# Altium PCB Modulator.PcbDoc (part 3 of 3)
Units mm, origin at the board's own origin, x right, y up, seen from the top; angles counter-clockwise.
Board outline 162.1 x 100.1 mm, 4 copper layers (L1, P2, P5, L6), stack 1.501 mm thick; 138 components, 105 nets, 515 pads, 355 vias.
Unrouted connection lines stored in the file: 38.
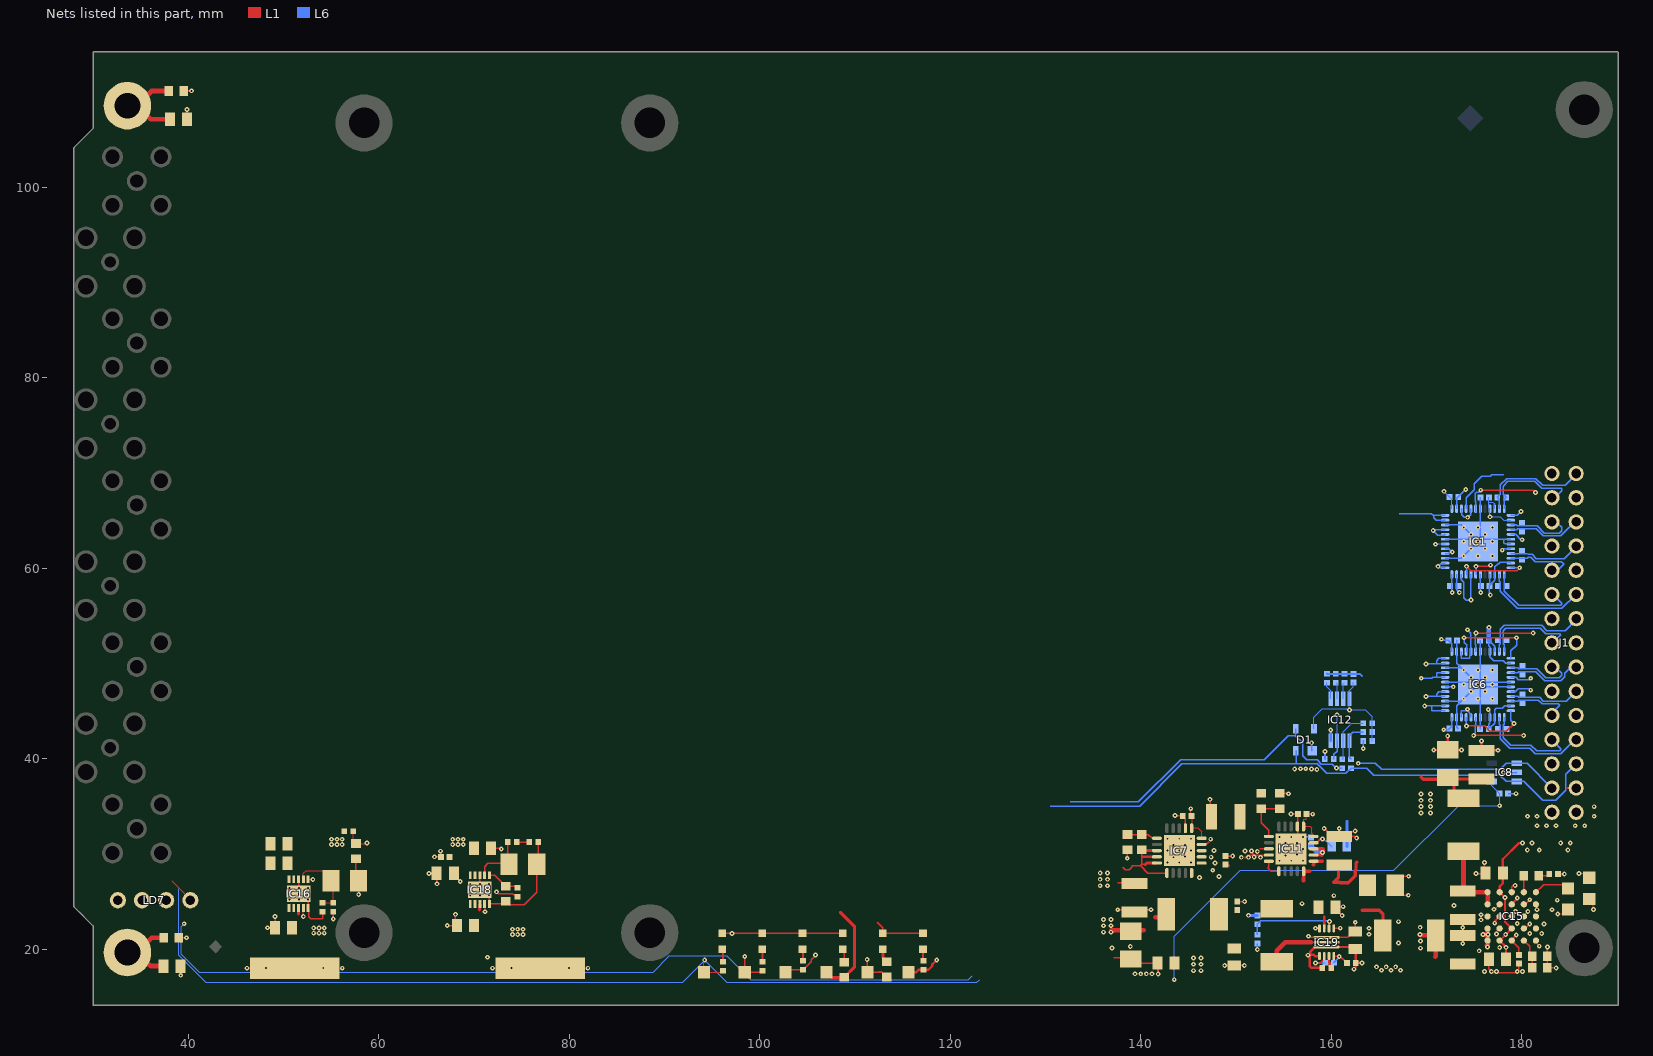
[diagram p4: the nets of this part, all layers, seen from the top]

## Via types
v1: diameter 0.5, hole 0.2, L1 to L6, tented top, 343 vias
v2: diameter 0.5, hole 0.2, L1 to L6, 12 vias

## Nets (pads, with @x,y where several pads share a name; then routed paths per layer and width w, separated by ;. In a path a pad name is that pad's centre, name@x,y a point inside that pad or via, vN(x,y) a via of type N, cw(c..) or ccw(c..) an arc to the next point about the centre after c; other vN are vias at no path point)
GND: C2.1 C3.1 C4.1 C5.1 C6.1 C7.1 C8.1 C9.1 C10.1 C48.1 C63.2 C64.1 C67.1 C70.1 C73.1 C74.2 C75.1 C77.1 C78.1 C117.2 C119.2 C120.2 C125.1 C126.1 C127.2 C144.2 C145.2 C146.2 C147.1 C148.2 C149.2 C150.2 C151.2 C152.1 C153.1 C154.1 C155.2 C156.2 C157.1 C158.1 C160.2 C165.1 C166.1 C183.1 CLIP4.1 CLIP30.1 D1.1 IC1.6 IC1.7 IC1.18 IC1.23 IC1.27 IC1.31 IC1.34 IC1.38 IC1.43 IC1.49 IC6.6 IC6.7 IC6.18 IC6.23 IC6.27 IC6.31 IC6.34 IC6.38 IC6.43 IC6.49 IC7.12 IC7.21 IC8.2 IC11.12 IC11.21 IC12.4 IC15.B5 IC15.C1 IC15.C2 IC15.C5 IC15.D5 IC16.5 IC16.8 IC16.11 IC18.5 IC18.8 IC18.11 IC19.3 IC19.4 IC19.11 J1.1 J1.4 J1.7 J1.10 J1.13 J1.16 J1.19 J1.22 J1.25 LD3.1 LD4.1 LD7.1 LD9.1 LD10.1 LD11.1 LD12.1 R55.2 R80.1 R82.2 R96.2 R104.1 R105.1 R106.1 R107.2 R119.1 R126.1 R127.1 R128.1 R131.1 R132.1 R136.1 R137.2 | length 196.1
  L1 w0.152: R137.2@39.033,21.191 v1(39.817,21.191) ; v1(39.202,17.254) C145.2@39.202,18.219 39.227,18.245 C145.2@39.202,18.27 ; R96.2@39.56,110.109 v1(40.345,110.109) ; C144.2@39.867,107.119 39.892,107.145 39.867,107.17 v1(39.867,108.135) ; v1(48.307,22.25) C117.2@49.107,22.25 v1(49.107,23.422) ; IC16.11@51.574,25.822 IC16.8@51.574,27.322 ; IC16.11@51.775,25.822 IC16.11@52.483,25.113 ; IC16.11@52.574,25.023 IC16.5@52.574,24.322 52.649,24.246 52.649,23.422 52.871,23.2 54.078,23.2 54.101,23.223 R104.1@54.101,23.921 ; v1(55.211,23.158) R105.1@55.211,23.933 ; R106.1@57.602,29.487 57.602,27.462 C146.2@57.884,27.181 v1(57.884,25.742) ; v2(65.275,27.953) C150.2@66.075,27.953 66.131,27.897 66.1,27.866 v2(66.1,26.859) ; v2(65.849,29.693) C147.1@66.525,29.693 66.475,29.742 v2(66.475,30.289) ; v1(67.182,22.479) C148.2@68.19,22.479 68.04,22.629 v1(68.04,23.653) ; IC18.8@70.604,27.744 v1(70.604,26.244) 70.805,26.244 71.604,25.445 IC18.5@71.604,24.744 73.022,24.744 R132.1@73.3,25.022 73.678,24.644 75.261,24.644 76.579,25.962 C151.2@76.579,28.908 76.715,29.043 R131.1@76.715,31.238 ; C149.2@71.775,30.601 72.5,30.601 72.526,30.574 72.788,30.574 v1(72.854,30.508) ; LD10.1@96.048,21.657 LD11.1@100.264,21.657 LD4.1@104.48,21.657 LD9.1@108.696,21.657 ; 112.33,22.814 112.912,22.232 LD12.1@112.912,21.657 LD3.1@117.128,21.657 ; 137.137,19.085 C156.2@138.898,19.085 ; v1(137.574,24.131) 139.092,24.131 C78.1@139.327,23.896 139.562,24.131 v1(141.079,24.131) ; C156.2@138.348,18.535 C156.2@138.898,19.085 ; v1(138.576,29.544) 138.576,30.412 R80.1@138.598,30.433 ; C183.1@141.748,18.535 139.448,18.535 C156.2@138.898,19.085 ; v1(143.577,34.044) 143.637,33.983 C77.1@144.398,33.983 144.685,33.697 IC7.12@144.685,32.692 ; C166.1@147.268,34.044 147.268,35.455 v1(147.268,35.727) ; v1@147.268,35.693 v1@147.407,35.553 ; v1(148.8,18.29) C154.1@149.794,18.29 v1(150.864,18.29) ; C63.2@148.907,30.027 149.157,29.777 v1(149.636,29.777) ; C153.1@150.121,25.008 150.14,24.989 v1(150.898,24.989) ; R119.1@154.559,36.36 155.459,36.36 v1(155.509,36.31) ; v1(155.763,34.188) C165.1@156.488,34.188 156.488,31.231 v1(156.385,31.127) v1(155.785,30.527) ; v1(157.613,21.35) 157.739,21.224 IC19.3@159.506,21.224 161.723,21.224 161.876,21.378 161.876,21.384 162.325,21.833 C158.1@162.5,21.833 162.5,22.815 v2(162.507,22.823) ; v2(159.243,32.672) 160.093,31.822 C75.1@160.826,31.822 ; IC19.11@160.256,19.274 v1@160.826,19.274 ; IC19.4@160.256,22.174 160.908,22.174 v1@160.866,22.216 ; v2(160.826,32.672) C75.1@160.826,31.822 ; v1@160.873,19.266 161.135,19.004 161.211,19.004 C157.1@161.662,18.552 ; v1(161.137,23.538) 161.113,23.538 160.434,24.217 C152.1@160.434,24.392 160.5,24.458 v1(161.238,24.458) ; C75.1@161.534,32.318 161.807,32.045 161.367,32.234 161.238,32.234 C75.1@160.926,31.922 ; C75.1@162.018,31.922 C75.1@161.701,31.922 ; v1(162.5,32.404) 162.439,32.344 162.189,32.344 162.166,32.321 162.1,32.321 C75.1@161.818,32.04 ; v1(162.66,31.66) 162.587,31.66 162.397,31.85 162.008,31.85 161.977,31.882 C75.1@161.818,32.04 ; v1(168.078,25.657) 167.395,25.657 167.225,25.827 167.225,26.167 167.055,26.336 167.055,26.349 C74.2@166.709,26.694 166.709,26.83 167.533,27.654 v1(168.119,27.654) ; v1(173.79,20.584) C73.1@173.79,21.424 v1(173.79,22.264) C125.1@173.79,23.103 ; v2(175.188,27.938) 176.142,27.938 C64.1@176.198,27.994 176.024,28.169 176.077,28.221 v2(176.077,29.108) ; C70.1@176.538,18.938 176.538,17.935 176.964,17.508 179.383,17.508 v1(179.52,17.646) 179.688,17.813 C67.1@179.688,18.488 ; v1(177.157,22.726) 177.157,22.927 IC15.C2@177.668,23.438 ; v1(182.689,20.231) 182.685,20.227 R55.2@182.685,19.255 R82.2@182.685,18.034 v1(183.598,18.034) ; C75.1@160.826,31.822 161.601,31.822 C75.1@161.701,31.922 ; C75.1@160.826,31.822 C75.1@160.926,31.922 ; C75.1@160.926,31.922 C75.1@161.701,31.922 ; C75.1@161.701,31.922 C75.1@161.818,32.04
  L1 w0.211: v1(141.814,17.39) C183.1@141.814,18.518
  L1 w0.25: v1(170.751,40.905) 172.185,40.905 C127.2@172.212,40.932 v1(172.212,42.38) ; C127.2@172.239,40.905 v1(173.672,40.905) ; v1(175.768,41.846) C126.1@175.768,40.857 175.792,40.881 v1(177.482,40.881) ; R107.2@183.794,27.877 v1(184.461,27.877)
  L6 w0.152: v1(152.229,19.97) R136.1@152.229,20.592 ; v1(157.035,31.777) 157.745,31.777 C160.2@157.827,31.696 ; v1(157.924,41.656) 157.924,40.875 D1.1@157.976,40.823 ; C155.2@160.269,18.574 160.826,19.131 v1(160.826,19.219) ; IC6.27@171.948,46.035 IC6.49@173.648,46.035 ; IC6.31@171.948,48.035 IC6.49@175.148,48.035 ; IC6.34@171.948,49.535 IC6.49@173.648,49.535 ; IC1.27@171.948,61.035 173.648,61.035 v1(173.898,61.285) v1(174.648,62.035) v1(175.398,62.785) ; IC1.31@171.948,63.035 IC1.49@175.148,63.035 ; IC1.34@171.948,64.535 173.648,64.535 v1(173.898,64.285) v1(174.648,63.535) IC1.49@175.148,63.035 ; IC1.23@173.148,59.335 173.148,57.728 v1(173.438,57.438) ; IC1.38@173.148,66.235 173.148,67.31 174.082,68.245 v1(174.107,68.245) ; C6.1@173.198,52.41 173.148,52.36 IC6.38@173.148,51.235 173.148,50.035 IC6.49@173.648,49.535 ; C7.1@173.298,43.16 173.148,43.31 IC6.23@173.148,44.335 173.148,45.535 IC6.49@173.648,46.035 ; C8.1@175.623,43.11 175.623,47.56 175.648,47.535 IC6.7@178.848,47.535 ; C3.1@175.623,52.41 175.648,52.385 IC6.43@175.648,51.235 IC6.49@175.648,48.035 ; IC1.18@175.648,59.335 175.648,57.478 v1(175.688,57.438) ; C4.1@175.648,67.435 IC1.43@175.648,66.235 IC1.49@175.648,63.035 ; v1(178.054,38.544) 179.432,38.544 IC8.2@179.448,38.56 ; 178.118,63.01 178.118,62.603 178.186,62.535 IC1.7@178.848,62.535 ; C10.1@178.555,36.322 v1(179.38,36.322) ; IC6.6@178.848,48.035 IC6.49@175.648,48.035 ; IC1.6@178.848,63.035 IC1.49@175.648,63.035 ; IC6.49@173.648,46.035 v1(173.898,46.285) v1(174.648,47.035) v1(175.398,47.785) ; IC6.49@173.648,49.535 v1(173.898,49.285) v1(174.648,48.535) IC6.49@175.148,48.035 ; IC6.49@175.148,48.035 v1(175.398,47.785) ; IC1.49@175.148,63.035 v1(175.398,62.785) ; v1(175.398,47.785) IC6.49@175.648,48.035 ; v1(175.398,62.785) IC1.49@175.648,63.035
  L6 w0.2: R126.1@159.534,48.923 159.554,48.903 C48.1@162.322,48.903 162.976,48.903 163.198,48.681
  L6 w0.25: IC12.4@159.946,41.889 v1@159.946,42.994
  other v1: 139.398,17.408 139.985,17.408 140.573,17.408 141.16,17.408 176.077,17.646 176.792,17.644 177.327,17.646 180.077,17.646 46.164,18.006 48.165,18.006 54.164,18.006 56.165,18.006 71.945,18.006 73.946,18.006 79.945,18.006 81.946,18.006 136.969,20.109 138.898,20.271 97.069,21.632 180.827,21.646 182.077,21.646 160.933,22.199 182.313,22.646 175.698,23.076 175.698,23.61 183.165,24.139 181.577,24.146 172.879,24.575 156.927,24.772 183.717,25.144 50.609,25.208 51.625,25.208 52.578,25.208 69.596,25.653 70.612,25.653 71.564,25.654 50.609,25.78 51.625,25.78 52.578,25.78 69.596,26.224 71.564,26.224 50.609,26.415 51.625,26.415 52.578,26.415 69.596,26.859 70.612,26.859 71.564,26.859 142.785,29.092 144.035,29.092 145.285,29.092 154.535,29.277 155.785,29.277 157.035,29.277 143.435,29.642 144.635,29.742 155.185,29.827 156.385,29.927 142.785,30.342 144.035,30.342 145.285,30.342 154.535,30.527 157.035,30.527 143.435,30.942 144.635,30.942 155.185,31.127 142.785,31.592 144.035,31.592 145.285,31.592 154.535,31.777 155.785,31.777 159.933,43.006 175.398,46.285 176.898,46.285 176.148,47.035 173.898,47.785 176.898,47.785 176.148,48.535 175.398,49.285 176.898,49.285 175.398,61.285 176.898,61.285 176.148,62.035 173.898,62.785 176.898,62.785 176.148,63.535 175.398,64.285 176.898,64.285
I2C_SCL: D1.3 IC8.1 J1.27 R125.1 | length 56.3
  L6 w0.152: 132.598,35.462 139.749,35.462 144.166,39.878 152.971,39.878 155.473,42.38 156.276,42.38 ; D1.3@156.276,43.124 156.276,42.352 156.972,41.656 156.972,41.593 156.972,40.322 157.416,39.878 158.5,39.878 158.949,39.429 160.113,39.429 v1(160.528,39.014) R125.1@161.148,39.014 ; v1(162.827,39.51) 164.63,39.51 165.278,38.862 177.731,38.862 178.379,39.51 IC8.1@179.448,39.51 180.566,39.51 J1.27@183.162,36.914
I2C_SDA: D1.2 IC8.3 J1.26 R124.1 | length 63
  L6 w0.152: 130.494,35.025 139.864,35.025 144.297,39.459 156.337,39.459 158.525,39.459 158.833,39.15 158.852,39.15 159.537,38.465 161.516,38.465 R124.1@162.065,39.014 163.735,39.014 164.476,38.274 177.684,38.274 178.347,37.61 IC8.3@179.448,37.61 180.207,37.61 182.187,35.631 183.562,35.631 184.611,36.68 184.611,38.362 J1.26@185.702,39.454 ; D1.2@156.276,40.823 156.337,40.762 156.337,39.497
LED0: 
LED1: 
LED2: 
LED3: 
LED4: 
LED5: 
LED6: 
LED7: 
LVDS0_N: IC1.48 J1.3 R7.2 | length 10.9
  L6 w0.152: IC1.48@178.148,66.235 178.148,67.215 R7.2@178.368,67.435 178.048,67.755 178.048,68.62 178.526,69.099 181.346,69.099 181.972,68.472 182.062,68.383 184.188,68.383 184.188,68.123 183.569,67.504 183.309,67.504 183.309,67.456 J1.3@183.128,67.275
LVDS0_P: IC1.47 J1.2 R7.1 | length 11.7
  L6 w0.152: IC1.47@177.648,66.235 177.648,67.215 R7.1@177.428,67.435 177.737,67.744 177.737,68.74 178.4,69.404 181.472,69.404 182.188,68.688 184.541,68.688 J1.2@185.668,69.815
LVDS1_N: IC1.4 J1.6 R9.2 | length 7.7
  L6 w0.152: IC1.4@178.848,64.035 179.527,64.035 ; 179.527,64.072 179.588,64.133 181.493,64.133 182.243,63.383 184.064,63.383 185.416,64.735 J1.6@185.668,64.735
LVDS1_P: IC1.3 J1.5 R9.1 | length 7.4
  L6 w0.152: IC1.3@178.848,64.535 179.425,64.535 179.523,64.438 181.619,64.438 182.369,63.688 183.938,63.688 184.188,63.938 184.188,64.288 183.74,64.735 J1.5@183.128,64.735
LVDS2_N: IC1.10 J1.9 R11.2 | length 7.5
  L6 w0.152: IC1.10@178.848,61.035 180.555,61.035 180.645,61.125 ; 180.645,61.133 180.938,61.133 181.383,60.688 184.161,60.688 184.378,60.47 184.378,60.389 183.645,59.655 J1.9@183.128,59.655
LVDS2_P: IC1.9 J1.8 R11.1 | length 7.5
  L6 w0.152: IC1.9@178.848,61.535 180.59,61.535 180.67,61.456 ; 180.67,61.438 181.064,61.438 181.509,60.993 184.465,60.993 J1.8@185.668,62.195
LVDS3_N: IC1.14 J1.12 R13.2 | length 11
  L6 w0.152: IC1.14@177.648,59.335 177.648,58.609 177.746,58.512 177.746,57.562 177.927,57.381 177.927,57.367 178.105,57.188 178.119,57.188 179.532,55.775 184.206,55.775 185.546,57.115 J1.12@185.668,57.115
LVDS3_P: IC1.13 J1.11 R13.1 | length 10
  L6 w0.152: IC1.13@178.148,59.335 178.148,57.59 179.659,56.08 184.08,56.08 184.188,56.188 184.188,56.315 183.388,57.115 J1.11@183.128,57.115
LVDS4_N: IC6.48 J1.15 R16.2 | length 10
  L6 w0.152: IC6.48@178.148,51.235 178.148,51.962 178.05,52.059 178.05,53.438 178.3,53.688 181.938,53.688 182.493,53.133 183.954,53.133 184.09,52.997 J1.15@183.128,52.035
LVDS4_P: IC6.47 J1.14 R16.1 | length 11.2
  L6 w0.152: IC6.47@177.648,51.235 177.648,51.962 177.746,52.059 177.746,53.564 178.174,53.993 182.064,53.993 182.619,53.438 184.531,53.438 J1.14@185.668,54.575
LVDS5_N: IC6.4 J1.18 R21.2 | length 8
  L6 w0.152: IC6.4@178.848,49.035 179.574,49.035 179.672,49.133 181.438,49.133 182.383,48.188 184.064,48.188 184.493,48.617 184.493,48.938 185.05,49.495 J1.18@185.668,49.495
LVDS5_P: IC6.3 J1.17 R21.1 | length 7.4
  L6 w0.152: IC6.3@178.848,49.535 179.574,49.535 179.672,49.438 181.564,49.438 182.509,48.493 183.938,48.493 184.188,48.743 184.188,48.938 183.631,49.495 J1.17@183.128,49.495
LVDS6_N: IC6.10 J1.21 R24.2 | length 6.8
  L6 w0.152: IC6.10@178.848,46.035 179.574,46.035 179.672,46.133 181.737,46.133 182.129,45.741 183.837,45.741 183.997,45.581 J1.21@183.162,44.746 ; J1.21@183.128,44.415 J1.21@183.128,44.628
LVDS6_P: IC6.9 J1.20 R24.1 | length 7.5
  L6 w0.152: IC6.9@178.848,46.535 179.574,46.535 179.672,46.438 181.863,46.438 182.256,46.046 184.674,46.046 J1.20@185.702,47.074
LVDS7_N: IC6.14 J1.24 R35.2 | length 11.5
  L6 w0.152: IC6.14@177.648,44.335 177.648,43.609 177.746,43.512 177.746,42.062 178.703,41.105 180.827,41.105 181.43,40.502 184.099,40.502 185.514,41.917 J1.24@185.591,41.994 ; J1.24@185.556,41.875 J1.24@185.668,41.875
LVDS7_P: IC6.13 J1.23 R35.1 | length 10.3
  L6 w0.152: IC6.13@178.148,44.335 178.148,43.609 178.05,43.512 178.05,42.188 178.829,41.41 180.953,41.41 181.556,40.806 183.972,40.806 184.1,40.934 184.1,41.056 J1.23@183.162,41.994
NetB1_1: B1.1 C144.1 R96.1 | length 8.9
  L1 w0.5: B1.1@33.604,108.547 34.603,108.547 36.147,110.091 R96.1@37.938,110.091 ; B1.1@35.002,108.547 35.002,108.163 36.046,107.119 C144.1@38.067,107.119
NetB2_1: B2.1 C145.1 R137.1 | length 7.7
  L1 w0.5: B2.1@33.604,19.647 34.603,19.647 36.147,21.191 R137.1@37.401,21.191 ; B2.1@35.002,19.647 35.002,19.263 36.046,18.219 C145.1@37.401,18.219
NetC67_2: C67.2 IC15.A3 IC15.E3 | length 3.6
  L1 w0.152: IC15.A3@178.938,25.978 178.938,26.514 179.112,26.688 v1(179.298,26.688) ; v1(179.416,21.485) 178.938,21.007 IC15.E3@178.938,20.898 179.688,20.148 C67.2@179.688,19.388
NetC73_2: C73.2 IC15.D1 IC15.E1 L2.1 | length 6.6
  L1 w0.483: v1(169.297,21.527) 169.386,21.438 L2.1@170.963,21.438 170.963,19.255 170.898,19.19 ; v1@176.323,20.424 176.398,20.499 IC15.E1@176.398,20.898 176.398,21.375 176.388,21.378 175.93,21.521 v1(175.927,21.527) 176.39,21.671 v1@176.435,21.685 ; IC15.D1@176.398,22.168 176.435,22.131 v1@176.435,21.685 ; v1(176.435,21.527) v1@176.435,21.685
  other v1: 175.52,19.825 169.348,20.104 176.384,20.231 169.348,20.841 169.323,22.289
NetC125_2: C125.2 IC15.A1 IC15.B1 L15.1 | length 8.1
  L1 w0.483: C125.2@173.79,26.103 173.804,26.117 C125.2@173.938,26.117 ; L15.1@173.871,30.283 173.871,26.184 C125.2@173.938,26.117 ; IC15.B1@176.398,24.708 IC15.A1@176.398,25.978 174.077,25.978 C125.2@173.938,26.117
NetC146_1: C146.1 IC16.7 R104.2 R105.2 | length 7.7
  L1 w0.127: IC16.7@52.074,27.322 52.074,27.945 52.381,28.253 53.834,28.253 53.868,28.219 54.148,28.219 54.984,27.382 C146.1@54.984,27.181 55.211,26.953 R105.2@55.211,24.873 55.2,24.861 R104.2@54.101,24.861
NetC151_1: C151.1 IC18.7 R114.2 | length 5.9
  L1 w0.152: IC18.7@71.104,27.744 71.104,28.666 71.446,29.008 C151.1@73.579,29.008 ; R114.2@73.552,31.238 73.552,29.036 C151.1@73.579,29.008 ; C151.1@73.679,28.908 C151.1@73.579,29.008
NetC155_1: C155.1 IC19.9 | length 2.4
  L1 w0.127: v1(158.332,18.552) 158.809,18.552 159.256,18.999 IC19.9@159.256,19.274
  L6 w0.127: v1(158.332,18.552) 159.346,18.552 C155.1@159.369,18.574
NetIC1_20: IC1.20 IC1.22 IC1.39 IC1.41 IC6.20 IC6.22 IC6.39 IC6.41 | length 15.5
  L6 w0.152: IC6.22@173.648,44.335 173.648,44.998 173.686,45.035 174.298,45.035 174.648,44.685 IC6.20@174.648,44.335 ; IC6.39@173.648,51.235 173.648,50.573 173.686,50.535 174.548,50.535 174.548,50.785 174.648,50.885 IC6.41@174.648,51.235 174.648,53.185 v1(174.298,53.535) ; IC1.22@173.648,59.335 173.648,58.778 173.916,58.51 173.916,56.904 174.172,56.648 v1(174.648,56.648) IC1.20@174.648,59.335 ; IC1.39@173.648,66.235 173.673,66.211 173.673,65.584 173.927,65.33 v1(174.308,65.33) 174.551,65.573 174.648,65.573 IC1.41@174.648,66.235
  other v1: 174.298,45.187
NetIC1_25: IC1.25 IC1.26 | length 2.3
  L6 w0.152: 171.438,60.438 171.493,60.438 ; IC1.25@171.948,60.035 171.286,60.035 171.188,60.133 171.493,60.438 ; 171.493,60.438 171.59,60.535 IC1.26@171.948,60.535 171.851,60.438 171.493,60.438
  other v1: 171.188,60.188
NetIC1_28: IC1.28 IC1.29 | length 1.7
  L6 w0.152: IC1.28@171.948,61.535 172.285,61.535 172.438,61.688 v1(172.688,61.688) 172.341,62.035 IC1.29@171.948,62.035
NetIC1_32: IC1.32 IC1.33 | length 2.8
  L6 w0.152: IC1.32@171.948,63.535 171.851,63.438 171.188,63.438 v1(170.688,63.938) 170.785,64.035 IC1.33@171.948,64.035
NetIC1_35: IC1.35 IC1.36 | length 6.4
  L6 w0.152: 167.153,65.722 170.498,65.722 170.688,65.532 170.691,65.535 IC1.36@171.948,65.535 ; 170.751,65.532 170.751,65.278 170.994,65.035 IC1.35@171.948,65.035
NetIC6_25: IC6.25 IC6.26 | length 4.1
  L6 w0.152: v1(169.793,45.535) 170.548,45.535 ; IC6.25@171.948,45.035 170.548,45.035 170.548,45.535 ; IC6.26@171.948,45.535 170.548,45.535
NetIC6_28: IC6.28 IC6.29 | length 3.3
  L6 w0.152: v1(169.929,46.535) 171.048,46.535 ; IC6.28@171.948,46.535 171.048,46.535 ; IC6.29@171.948,47.035 171.298,47.035 171.048,46.785 171.048,46.535
NetIC6_32: IC6.32 IC6.33 | length 4
  L6 w0.152: v1(169.438,48.438) 170.548,48.438 170.645,48.535 171.048,48.535 ; IC6.32@171.948,48.535 171.048,48.535 ; IC6.33@171.948,49.035 171.048,49.035 171.048,48.535
NetIC6_35: IC6.35 IC6.36 | length 3.4
  L6 w0.152: v1(169.938,49.938) 171.048,49.938 ; IC6.35@171.948,50.035 171.851,49.938 171.048,49.938 ; IC6.36@171.948,50.535 171.286,50.535 171.048,50.298 171.048,49.938
NetIC7_16: IC7.16 R23.1 R80.2 | length 3.2
  L1 w0.152: R80.2@138.598,32.033 R23.1@140.098,32.033 140.798,32.033 141.189,31.642 IC7.16@141.685,31.642
NetIC11_16: IC11.16 R118.1 R119.2 | length 5.2
  L1 w0.152: IC11.16@153.435,31.827 153.435,32.499 152.654,33.279 R118.1@152.654,34.76 R119.2@154.559,34.76
NetIC12_1: IC12.1 R121.1 R124.2 | length 4.1
  L6 w0.152: R124.2@162.065,39.954 161.896,40.124 IC12.1@161.896,41.889 161.896,42.417 162.255,42.777 ; 162.258,42.78 162.255,42.777 ; R121.1@163.351,42.777 162.255,42.777
NetIC12_2: IC12.2 R122.1 R125.2 | length 5.4
  L6 w0.127: R125.2@161.148,39.954 161.246,40.051 IC12.2@161.246,41.889 161.246,42.839 162.118,43.711 R122.1@163.351,43.711
NetIC12_3: IC12.3 LD7.3 R123.1 | length 4.8
  L6 w0.127: IC12.3@160.596,41.889 v1@160.596,44.604
  L6 w0.152: R123.1@160.263,39.942 160.263,40.469 160.596,40.801 IC12.3@160.596,41.889
  other v1: 160.591,44.604
NetIC12_5: IC12.5 R126.2 | length 1.9
  L6 w0.127: R126.2@159.534,47.983 159.534,47.561 159.946,47.15 IC12.5@159.946,46.289
NetIC12_6: IC12.6 R127.2 | length 1.7
  L6 w0.127: R127.2@160.463,47.983 160.596,47.851 IC12.6@160.596,46.289
NetIC12_7: IC12.7 R128.2 | length 1.8
  L6 w0.127: IC12.7@161.246,46.289 161.246,47.836 R128.2@161.393,47.983
NetIC15_A4: IC15.A4 R108.1 | length 1.7
  L1 w0.152: R108.1@180.185,27.689 180.208,27.666 IC15.A4@180.208,25.978
NetIC15_A5: IC15.A5 TP9.1 | length 3.9
  L1 w0.152: IC15.A5@181.478,25.978 182.274,26.774 184.455,26.774 TP9.1@184.849,26.381
NetIC15_B2: IC15.B2 IC15.D2 R120.1 R123.2 | length 3.3
  L1 w0.127: v1@177.146,24.186 IC15.B2@177.668,24.708 ; v1(177.324,21.59) 177.202,21.59 177.146,21.646 IC15.D2@177.668,22.168
  L6 w0.2: R123.2@159.323,39.942 v1(159.323,40.74) ; v1(163.351,41.056) R120.1@163.351,41.843 R120.1@163.356,41.838
  other v1: 177.077,24.186
NetIC15_C3: IC15.C3 TP5.1 | length 2
  L1 w0.127: IC15.C3@178.938,23.438 179.396,23.896 v1(179.327,23.965) ; v1(185.992,27.944) 186.623,27.944 TP5.1@187.071,27.495
NetIC15_C4: IC15.C4 TP6.1 | length 1.9
  L1 w0.127: IC15.C4@180.208,23.438 180.208,23.506 180.626,23.924 v1(180.626,23.94) ; v1(183.769,23.697) 184.4,23.697 TP6.1@184.849,24.146
NetIC15_E4: IC15.E4 R55.1 R82.1 | length 3.3
  L1 w0.152: IC15.E4@180.208,20.898 180.827,20.279 180.827,19.499 R55.1@181.085,19.241 ; R82.1@181.085,18.034 R55.1@181.085,19.241 ; R55.1@181.085,19.255 R55.1@181.085,19.241 ; R55.1@181.138,19.207 181.138,19.188 R55.1@181.085,19.241
NetIC15_E5: IC15.E5 TP7.1 | length 2
  L1 w0.127: IC15.E5@181.478,20.898 181.478,20.723 v1@181.857,20.344 ; TP7.1@187.071,25.245 187.519,24.797 v1(187.519,24.166)
  other v1: 181.827,20.313
NetIC16_6: IC16.6 R106.2 R110.1 | length 3.1
  L1 w0.127: IC16.6@52.574,27.322 v1(53.074,27.322) ; R110.1@57.333,32.373 57.333,31.356 R106.2@57.602,31.087 58.689,31.087 v1(58.757,31.155)
NetIC18_6: IC18.6 R132.2 R133.1 | length 3.5
  L1 w0.152: IC18.6@71.604,27.744 72.178,27.744 R132.2@73.3,26.622 74.402,26.622 R133.1@74.575,26.448
NetIC19_2: IC19.2 L4.1 | length 5.1
  L1 w0.5: L4.1@154.265,18.688 154.265,19.835 155.153,20.723 157.873,20.723 157.874,20.724
NetIC19_5: IC19.5 R135.1 R136.2 | length 9.6
  L1 w0.152: IC19.5@159.756,22.174 159.781,22.199 159.781,22.878 v1(159.805,22.903)
  L6 w0.152: R136.2@152.229,21.532 R135.1@152.229,22.592 152.597,22.961 159.748,22.961 v1(159.805,22.903)
NetIC19_10: IC19.10 R134.1 | length 1.3
  L1 w0.254: IC19.10@159.756,19.274 159.756,18.637 159.848,18.545 159.848,18.159 R134.1@159.973,18.035
NetLD2_2: 
NetLD2_4: 
NetLD3_2: LD3.2 R33.2 | length 1.2
  L1 w0.254: LD3.2@117.128,20.007 117.128,18.836 R33.2@117.182,18.783
NetLD4_2: LD4.2 R115.2 | length 1.3
  L1 w0.2: LD4.2@104.48,20.007 104.547,19.94 R115.2@104.547,18.759
NetLD5_2: 
NetLD5_4: 
NetLD6_2: 
NetLD6_4: 
NetLD7_4: LD7.4 | length 2.9
  L1 w0.127: 38.259,27.181 40.218,25.222 LD7.4@40.218,25.135
NetLD8_2: 
NetLD8_4: 
NetLD9_2: LD9.2 R139.1 | length 1.4
  L1 w0.152: LD9.2@108.696,20.007 108.841,19.862 R139.1@108.841,18.634
NetLD10_2: LD10.2 R116.2 | length 1.4
  L1 w0.2: LD10.2@96.048,20.007 96.117,19.939 R116.2@96.117,18.665
NetLD11_2: LD11.2 R144.2 | length 1.3
  L1 w0.2: R144.2@100.264,18.665 LD11.2@100.264,20.007
NetLD12_2: LD12.2 R109.1 | length 1.5
  L1 w0.3: LD12.2@112.912,20.007 112.912,19.09 R109.1@113.325,18.678
NetR107_1: R107.1 R108.2 | length 1.1
  L1 w0.152: R108.2@181.785,27.689 R107.1@182.848,27.689
NetR114_1: R114.1 R131.2 | length 1.3
  L1 w0.152: R114.1@74.491,31.238 R131.2@75.775,31.238
P3V3: C2.2 C3.2 C4.2 C5.2 C6.2 C7.2 C8.2 C9.2 C166.2 IC1.2 IC1.11 IC1.15 IC1.16 IC1.24 IC1.30 IC1.37 IC1.45 IC1.46 IC6.2 IC6.11 IC6.15 IC6.16 IC6.24 IC6.30 IC6.37 IC6.45 IC6.46 IC11.1 IC11.18 IC11.19 IC11.20 R115.1 R118.2 TP12.1 | length 45.4
  L1 w0.152: TP12.1@102.706,17.577 102.948,17.819 R115.1@104.547,17.819 105.383,18.655 105.383,18.907 v1(105.855,19.378) ; 150.898,29.535 151.24,29.877 v1@151.923,29.877 ; v1@151.598,30.202 v1@151.923,29.877 ; 152.483,30.535 153.427,30.535 IC11.18@153.435,30.527 ; IC11.20@153.435,29.227 153.435,28.673 153.297,28.535 153.655,28.177 IC11.1@154.485,28.177 ; IC11.19@153.435,29.877 v1@151.923,29.877
  L6 w0.127: v1(170.923,62.51) 170.948,62.535 IC1.30@171.948,62.535 ; v1(171.823,68.06) 172.648,67.235 IC1.37@172.648,66.235 ; C4.2@176.548,67.435 176.548,66.925 ; IC1.46@177.148,66.235 177.148,66.735 176.958,66.925 176.548,66.925 ; IC1.2@178.848,65.035 178.098,65.035 177.748,65.385 v1(176.648,65.385) IC1.45@176.648,66.235 176.548,66.335 176.548,66.925
  L6 w0.152: v1(171.548,52.535) 171.673,52.41 C6.2@172.298,52.41 172.648,52.06 IC6.37@172.648,51.235 ; v1(171.798,43.035) 172.273,43.035 C7.2@172.398,43.16 172.648,43.41 IC6.24@172.648,44.335 ; IC6.30@171.948,47.535 v1(172.798,47.535) ; IC1.24@172.648,59.335 172.648,57.478 v1(172.688,57.438) ; v1(176.466,45.148) 176.485,45.148 176.648,44.985 IC6.16@176.648,44.335 176.648,43.752 176.523,43.626 C8.2@176.523,43.11 ; v1@176.523,53.76 v1(176.548,53.785) ; C2.2@176.577,58.157 C2.2@176.648,58.228 ; C8.2@176.648,43.235 177.148,43.735 IC6.15@177.148,44.335 177.148,45.135 177.298,45.285 177.936,45.285 178.186,45.535 IC6.11@178.848,45.535 ; IC1.16@176.648,59.335 C2.2@176.648,58.228 ; v1(176.688,57.188) 176.598,57.278 C2.2@176.598,58.135 176.648,58.185 C2.2@176.648,58.228 ; IC6.46@177.148,51.235 177.148,51.785 C3.2@176.523,52.41 176.523,51.86 176.648,51.735 IC6.45@176.648,51.235 176.648,50.685 177.048,50.285 178.048,50.285 178.298,50.035 IC6.2@178.848,50.035 ; IC1.11@178.848,60.535 178.765,60.618 177.718,60.618 177.582,60.482 177.495,60.482 177.148,60.135 IC1.15@177.148,59.335 177.148,58.728 C2.2@176.648,58.228
  L6 w0.483: C3.2@176.523,52.41 v1@176.523,53.76
  other v1: 150.548,29.635 151.298,29.635 152.548,29.635 151.898,29.68 152.229,30.264 150.933,30.29 151.619,30.29 158.478,38.865 156.147,38.925 157.924,38.925 156.753,38.935 157.307,38.935
P3V3_MP: C10.2 C48.2 D1.4 IC8.4 IC12.8 J1.30 R116.1 R120.2 R121.2 R122.2 TP14.1 | length 158.4
  L1 w0.127: v1(94.204,18.848) 94.133,18.777 94.133,18.428 94.117,18.412 TP14.1@94.117,17.577 95.969,17.577 R116.1@96.117,17.725
  L6 w0.127: 38.989,26.326 38.989,19.367 41.828,16.529 91.916,16.529 94.204,18.817 v1(94.204,18.848) 96.524,16.529 122.795,16.529 123.063,16.797 ; v1(143.51,16.797) 143.51,21.347 150.421,28.258 166.56,28.258 173.355,35.052 v1(177.668,35.052) 177.655,35.065 C10.2@177.655,36.322 176.827,37.151 IC8.4@176.827,37.61 ; D1.4@158.176,43.124 158.176,44.321 159.067,45.212 161.607,45.212 161.635,45.185 161.723,45.185 161.734,45.173 v1@161.734,45.085 ; C48.2@162.307,48.003 162.307,47.561 161.896,47.15 IC12.8@161.896,46.289 v1(161.896,45.113) 163.561,45.113 164.291,44.383 R122.2@164.291,43.711 R121.2@164.291,42.777 R120.2@164.291,41.843
P3V3A: C78.2 IC7.1 IC7.18 IC7.19 IC7.20 R23.2 R144.1 TP13.1 | length 17
  L1 w0.152: 137.577,26.959 137.587,26.948 C78.2@138.099,26.948 ; 138.099,28.596 138.379,28.316 138.775,28.316 139.055,28.596 139.055,28.733 139.928,28.733 ; 139.968,28.774 140.098,28.904 ; 140.098,29.692 R23.2@140.098,30.433 140.098,28.904 ; 140.457,28.904 140.098,28.904 ; IC7.18@141.594,30.433 IC7.18@141.685,30.342 ; IC7.1@142.735,27.992 140.75,27.992 140.009,28.733 139.928,28.733 ; 139.928,28.733 140.098,28.904
  L1 w0.2: v1(98.415,19.234) 98.411,19.231 TP13.1@98.411,17.577 100.116,17.577 R144.1@100.264,17.725
  L1 w0.3: R23.2@140.098,30.433 140.189,30.342 IC7.18@141.685,30.342 ; 140.189,29.692 IC7.19@141.685,29.692 ; 140.457,28.904 140.596,29.042 IC7.20@141.685,29.042
  other v1: 135.73,26.657 136.508,26.657 135.73,27.331 136.508,27.331 135.73,27.99 136.508,27.99
P3V6: C63.1 C74.1 C75.2 C160.1 IC7.5 IC7.6 IC7.7 IC7.8 IC11.5 IC11.6 IC11.7 IC11.8 L2.2 | length 18.6
  L1 w0.152: v1(146.151,27.515) 146.447,27.515 ; C63.1@148.907,28.827 149.293,28.827 149.293,28.713
  L1 w0.211: v1(159.077,30.146) 159.264,30.334
  L1 w0.35: 157.085,27.449 IC11.5@157.085,28.177 157.745,28.177 157.766,28.156 ; 158.107,28.849 158.135,28.849 IC11.6@158.135,29.227 159.031,29.227 159.061,29.198 ; IC11.7@158.135,29.877 158.966,29.877 158.985,29.858 ; IC11.8@158.135,30.527 159.128,30.527 159.163,30.493 ; C75.2@160.826,28.822 160.755,28.751 160.755,27.523 160.247,27.015 160.882,27.015 160.933,26.965 161.771,26.965 162.507,27.701 162.507,28.26 162.584,28.336 162.584,29.047 162.66,29.124 ; 163.227,24.092 165.03,24.092 165.413,23.709 L2.2@165.413,21.438 L2.2@165.192,21.217
  L1 w0.406: 157.08,27.191 157.085,27.196 157.085,27.449
  L6 w0.152: v1(159.077,30.146) v1@159.12,30.19
  L6 w0.5: C160.1@157.871,30.825 158.55,30.146 v1(159.077,30.146)
  other v1: 167.048,20.635 163.943,21.567 163.943,22.193 167.048,22.885 148.209,27.629 147.548,28.283 147.798,29.033 147.383,29.653 147.691,30.364
P5V0A: C77.2 C119.1 C120.1 C165.2 IC7.10 IC7.11 IC11.10 IC11.11 IC16.9 IC16.10 R110.2 R139.2 TP16.1 | length 18.1
  L1 w0.127: v1(145.235,34.745) 145.235,34.031 145.298,33.968 C77.2@145.298,33.983 ; C77.2@145.323,33.939 145.399,33.863 145.399,32.72 145.983,32.72 146.385,32.318 IC7.10@146.385,31.642 ; 157.918,32.22 157.918,32.751 157.792,32.877 IC11.11@157.085,32.877 157.109,32.901 157.109,33.612 157.363,33.612 157.388,33.637 C165.2@157.388,34.188 158.031,34.188 v1(158.048,34.171)
  L1 w0.152: 157.918,32.22 157.918,31.89 157.981,31.827 IC11.10@158.135,31.827
  L1 w0.3: TP16.1@107.001,17.577 107.544,17.034 R139.2@108.841,17.034 109.956,18.149 109.956,22.348 108.436,23.869
  other v1: 55.041,30.981 55.595,30.981 56.149,30.981 55.041,31.535 55.595,31.535 56.149,31.535
P5V5: C152.2 C153.2 C154.2 IC19.6 L4.2 L5.1 R135.2 | length 2.1
  L1 w0.3: IC19.6@159.256,22.174 159.256,23.356
  L6 w0.3: v1(151.298,23.552) 151.318,23.532 R135.2@152.229,23.532
P5V5A: C117.1 C156.1 C183.2 IC16.1 IC16.2 IC16.3 L5.2 | length 5.9
  L1 w0.3: 51.574,23.672 IC16.3@51.574,24.322
  L1 w0.4: L5.2@142.079,23.86 L5.2@142.279,23.66
  L1 w0.5: v1@136.916,21.985 140.292,21.985 ; 141.529,23.36 L5.2@143.085,23.36
  other v1: 53.158,21.675 53.712,21.675 54.266,21.675 136.081,21.784 136.858,21.784 53.158,22.229 53.712,22.229 54.266,22.229 136.081,22.459 136.858,22.459 136.081,23.118 136.858,23.118
P7V0A: C147.2 C149.1 C150.1 IC18.9 IC18.10 R109.2 R133.2 TP17.1 | length 6
  L1 w0.17: v1(72.357,26.018) 72.553,25.822 74.022,25.822 74.13,25.713 74.371,25.713 R133.2@74.575,25.508 ; v1(111.266,18.901) 111.296,18.872 TP17.1@111.296,17.577 112.456,17.577 112.478,17.599 112.804,17.599 R109.2@113.325,17.078
  other v1: 71.414,19.147 68.552,27.1 67.754,30.981 68.308,30.981 68.862,30.981 67.754,31.535 68.308,31.535 68.862,31.535
P7V5: C126.2 C127.1 C148.1 IC18.1 IC18.2 IC18.3 L15.2 R53.2 | length 12.5
  L1 w0.3: 70.577,24.094 70.577,24.312 70.604,24.339 IC18.3@70.604,24.744
  L1 w0.35: 169.416,38.056 169.626,37.846 C127.1@172.212,37.846 ; L15.2@172.593,36.122 172.879,36.408 172.879,37.831 172.864,37.846 C127.1@172.212,37.846 ; C126.2@175.768,37.857 172.387,37.857 C127.1@172.212,38.032 C127.1@172.212,37.846
  L6 w0.3: R53.2@161.626,30.769 161.626,33.417 161.635,33.426
  other v1: 74.022,21.536 74.575,21.536 75.129,21.536 74.022,22.09 74.575,22.09 75.129,22.09 169.398,34.29 170.421,34.29 169.398,34.965 170.421,34.965 169.398,35.623 170.421,35.623 169.398,36.298 170.421,36.298
P12V0: C64.2 C70.2 C157.2 C158.2 IC15.A2 IC15.B3 IC15.D3 IC15.E2 IC19.1 IC19.8 J1.28 J1.29 R33.1 R134.2 TP18.1 | length 32.2
  L1 w0.211: IC15.A2@177.668,25.978 v1(178.231,25.415) 178.231,22.875 IC15.D3@178.938,22.168 v2(178.303,21.533) IC15.E2@177.668,20.898 178.338,20.228 v1(178.338,20.193) C70.2@178.338,18.938
  L1 w0.254: TP18.1@115.59,17.577 116.425,17.577 116.672,17.823 117.162,17.823 R33.1@117.182,17.843 117.691,17.843 118.109,18.26 118.109,18.407 v1(118.574,18.872) ; v2(157.543,19.367) 157.577,19.401 158.153,19.401 158.28,19.274 IC19.8@158.756,19.274 ; v2@157.74,19.219 157.74,18.184 157.889,18.035 R134.2@159.033,18.035 R134.2@158.87,18.198 ; 157.795,19.528 157.795,19.738 158.281,20.224 IC19.1@159.506,20.224 162.309,20.224 C158.2@162.5,20.033 162.562,19.971 C157.2@162.562,18.552 ; v1(162.365,17.896) 162.365,17.961 162.562,18.158 C157.2@162.562,18.552 ; v1(163.228,18.552) C157.2@162.562,18.552 ; IC15.A2@177.668,25.978 177.668,26.576 177.998,26.906 C64.2@177.998,27.994 177.998,29.432 179.712,31.146 v1(180.077,31.146) ; IC15.B3@178.938,24.708 178.938,24.751 179.52,25.333 v2(179.52,25.376) ; 184.783,36.914 J1.28@185.702,36.914
  other v1: 145.526,17.74 146.304,17.74 165.259,17.78 166.259,17.78 167.259,17.78 164.751,18.146 165.751,18.146 166.751,18.146 145.526,18.415 146.304,18.415 145.526,19.074 146.304,19.074 177.668,20.185 179.52,22.7 180.577,30.396 181.827,30.396 184.827,30.396 181.077,31.146 184.077,31.146 185.077,31.146 181.592,32.956 182.592,32.956 183.592,32.956 185.592,32.956 186.592,32.956 180.592,33.956 181.592,33.956 187.592,33.956 187.592,34.956
PGOOD: IC7.9 IC11.9 IC15.B4 IC15.D4 IC16.4 IC18.4 IC19.7 LD7.2 R53.1 | length 96.8
  L1 w0.127: v1(52.074,23.429) IC16.4@52.074,24.322 ; IC18.4@71.104,24.744 71.153,24.695 v1(71.153,23.921) ; v1(158.332,22.191) 158.74,22.191 IC19.7@158.756,22.174
  L1 w0.152: IC7.9@146.385,30.992 146.883,30.992 147.185,31.294 ; IC11.9@158.135,31.177 IC11.9@158.485,31.177 ; IC15.D4@180.208,22.168 180.349,22.168 v1(180.827,22.646) ; IC15.B4@180.349,24.708 v1(180.827,25.186) ; IC11.9@158.485,31.177 158.721,31.413 ; IC11.9@158.485,31.177 158.721,31.413 ; 158.721,31.413 158.721,31.493 158.888,31.66 158.888,31.58 158.721,31.413
  L6 w0.127: v1(39.56,22.669) 39.243,22.352 39.243,19.473 41.15,17.565 88.79,17.565 90.514,19.289 96.526,19.289 99.033,16.783 121.875,16.783 122.301,17.209 ; v1@159.067,31.744 v1(159.067,31.559) 159.168,31.559 159.367,31.361 159.434,31.361 R53.1@160.026,30.769
  other v1: 160.263,25.613 147.326,31.544
R\E\_DE0: IC1.1 IC1.40 | length 7.7
  L6 w0.152: IC1.40@174.148,66.235 174.148,67.385 174.998,68.235 174.998,68.878 175.792,69.672 176.695,69.672 176.823,69.799 178.025,69.799 178.069,69.843 ; IC1.1@178.848,65.535 179.523,65.535 v1(179.923,65.935)
R\E\_DE1: IC1.5 IC1.42 | length 10
  L1 w0.152: v1(175.688,68.188) 181.188,68.188 v1(181.438,67.938)
  L6 w0.152: IC1.42@175.148,65.885 IC1.42@175.148,66.235 175.148,66.993 175.11,67.031 175.11,67.84 175.243,67.974 175.474,67.974 v1(175.688,68.188) ; IC1.5@178.848,63.535 179.341,63.535 179.899,62.977 v1(180.03,62.977)
R\E\_DE2: IC1.8 IC1.19 | length 3.6
  L1 w0.152: v1(175.188,60.188) 176.454,60.188 176.695,60.429 v1(176.695,60.308)
  L6 w0.152: IC1.19@175.148,59.335 175.188,59.375 v1(175.188,60.188) ; v1(177.938,61.883) 178.091,62.035 IC1.8@178.848,62.035
R\E\_DE3: IC1.12 IC1.21 | length 7.7
  L1 w0.152: v1(174.188,60.188) 174.65,59.726 179.459,59.726 v1(179.768,60.035)
  L6 w0.152: IC1.21@174.148,59.335 174.188,59.375 v1(174.188,60.188) ; IC1.12@178.848,60.035 v1(179.768,60.035)
R\E\_DE4: IC6.1 IC6.40 | length 9.5
  L1 w0.152: v1(173.938,52.688) v1(179.438,52.688)
  L6 w0.152: v1(173.938,52.688) 173.938,52.188 174.188,51.938 174.188,51.275 IC6.40@174.148,51.235 ; IC6.1@178.848,50.535 178.848,51.317 179.438,51.907 v1(179.438,52.688)
R\E\_DE5: IC6.5 IC6.42 | length 10.4
  L1 w0.152: v1(175.188,53.188) v1(181.188,53.188)
  L6 w0.152: IC6.42@175.148,51.235 175.148,51.943 175.085,52.006 175.085,53.085 v1(175.188,53.188) v1@175.188,53.322 ; IC6.5@178.848,48.535 179.405,48.535 179.643,48.297 180.797,48.297 v1(180.938,48.438)
R\E\_DE6: IC6.8 IC6.19 | length 9.5
  L1 w0.152: v1(174.938,42.438) v1(180.188,42.438)
  L6 w0.152: v1(174.938,42.438) 175.085,42.585 175.085,43.515 175.148,43.578 IC6.19@175.148,44.335 ; IC6.8@178.848,47.035 179.305,47.035 179.618,47.349 180.777,47.349 v1(180.938,47.188)
R\E\_DE7: IC6.12 IC6.21 | length 8
  L1 w0.152: v1(174.188,43.438) 176.087,43.438 176.648,42.877 178.377,42.877 v1(179.188,43.688)
  L6 w0.152: IC6.21@174.148,44.335 174.148,43.478 v1(174.188,43.438) ; IC6.12@178.848,45.035 178.848,44.028 v1(179.188,43.688)
SG0: 
SG1: 
SG2: 
SG3: 
SG4: 
pads on no net: .1 .2 FTG2.1 FTG3.1 FTG4.1 IC1.17 IC1.44 IC6.17 IC6.44 IC7.2 IC7.3 IC7.4 IC7.13 IC7.14 IC7.15 IC7.17 IC8.5 IC11.2 IC11.3 IC11.4 IC11.13 IC11.14 IC11.15 IC11.17 J5.1 J5.2 J6.1 J6.2 J7.1 J7.2 J15.1 J15.2 J16.1 J16.2 J17.1 J17.2 J18.1 J18.2 J19.1 J19.2
copper on no net: | length 9.4
  L6 w0.152: 131.672,26.771 132.688,26.771 ; 133.217,32.016 133.217,32.703
  L6 w0.3: 131.672,24.971 133.75,24.971 133.895,25.116 ; 131.863,31.116 133.217,31.116 134.541,31.116 134.72,31.296 134.72,30.571 134.276,30.126 134.276,29.497 133.895,29.116
  other v1: 174.721,24.575

## Polygon pours and split planes (outlines as drawn)
P5V5A on L1 "P5V5A_L01_P052" (solid, remove dead copper, pour order 52): 136.199,20.646 139.327,20.646 140.148,20.646 140.648,20.146 142.577,18.217 142.577,17.702 142.577,17.408 142.827,17.158 142.839,17.146 143.327,17.146 144.577,17.146 144.827,17.396 144.827,19.448 144.577,19.698 144.577,26.335 141.889,26.335 140.586,25.033 137.081,25.033 136.773,25.336 135.419,25.336 135.001,24.918 135.001,21.844
no net on L1 "balancing" (solid, pour order 362): 44.905,233.327 197.801,233.327 197.801,139.39 157.11,139.39 156.157,138.455 45.888,138.455 44.918,139.426 44.905,144.442 39.381,144.442 39.381,228.275 44.905,228.275
NetC73_2 on L1 "NETC73_2_L01_P060" (solid, remove dead copper, pour order 60): 170.035,25.149 172.138,25.149 172.138,22.396 172.138,20.46 175.042,20.46 175.502,20.92 175.502,22.099 175.799,22.396 176.825,22.396 176.827,19.646 175.799,19.646 175.813,17.158 169.716,17.158 168.823,18.051 168.823,23.937
GND on L1 "GND_L01_P058" (solid, remove dead copper, pour order 58): 172.338,25.147 178.077,25.147 178.077,22.396 177.827,22.396 175.799,22.396 175.671,22.288 175.681,22.278 175.577,22.174 175.577,21.337 175.148,20.864 172.338,20.859
P12V0 on L1 "L1-P12V0" (solid, remove dead copper, pour order 366): 188.595,32.571 188.595,34.577 188.595,35.161 188.595,36.905 187.604,37.896 184.454,37.896 182.943,36.385 182.943,35.161 181.102,35.161 177.098,31.157 177.098,26.792 177.327,26.563 177.327,25.146 178.077,25.146 178.077,21.646 177.327,21.646 177.077,21.396 177.077,20.646 177.077,20.179 177.438,19.818 177.438,18.938 177.438,18.12 177.856,17.702 178.902,17.702 179.228,18.028 179.188,18.068 179.188,19.952 178.577,20.563 178.577,21.146 178.827,21.396 179.327,21.396 180.077,22.146 180.077,24.896 179.327,25.646 179.327,28.198 180.228,29.1 185.138,29.1 188.595,32.556
NetC125_2 on L1 "NETC125_2_L01_P302" (solid, remove dead copper, pour order 302): 176.198,24.447 175.23,25.415 170.029,25.415 168.846,26.598 168.847,30.859 169.992,32.004 175.885,32.004 176.964,30.924 176.964,24.762 176.65,24.447
P3V6 on L1 "P3V6_L01_P050" (solid, remove dead copper, pour order 50): 149.197,30.691 152.102,27.785 154.148,27.785 154.512,27.422 156.738,27.422 156.738,30.832 165.804,30.832 167.648,28.988 167.648,18.656 164.398,18.656 163.488,19.566 163.488,22.816 160.426,25.878 145.014,25.878 145.014,30.691
GND on L1 "GND_L01_P048" (solid, remove dead copper, pour order 48): 183.972,25.396 183.972,17.158 175.813,17.158 175.813,19.647 179.361,19.647 179.861,20.147 179.861,23.931 181.327,25.396 182.827,25.396
P5V5 on L1 "P5V5_L01_P062" (solid, remove dead copper, pour order 62): 145.863,25.746 159.973,25.746 159.973,21.679 154.357,21.679 152.234,19.557 151.867,19.19 145.863,19.19
P7V5 on L1 "P7V5_L01_P042" (solid, remove dead copper, pour order 42): 68.862,25.512 68.862,19.517 73.992,19.517 75.674,21.199 75.674,22.784 72.951,25.506
GND on L1 "GND_L01_P367" (solid, pour order 367): 156.874,21.155 163.35,21.155 163.35,22.775 160.882,25.242 159.892,25.242 159.753,25.103 159.753,21.872 156.955,21.872 156.927,21.844
P5V0A on L1 "P5V0A_L01_P254" (solid, remove dead copper, pour order 254): 53.723,26.447 56.665,29.388 56.664,32.373 56.538,32.5 50.089,32.5 49.107,31.517 49.107,26.447
P5V5A on L1 "P5V5A_L01_P154" (solid, remove dead copper, pour order 154): 49.949,22.707 49.949,21.406 54.703,21.406 55.211,21.914 55.211,24.403 54.772,24.842 49.949,24.843
P7V0A on L1 "P7V0A_L01_P056" (solid, remove dead copper, pour order 56): 66.975,26.9 70.626,26.9 70.626,33.34 67.829,33.34 66.975,32.486
P3V3 on L1 "L1-P3V3" (solid, remove dead copper, pour order 365): 159.131,39.624 149.987,39.624 148.272,37.91 148.273,31.911 151.539,28.644 152.243,27.941 154.648,27.941 154.648,30.691 152.688,30.691 151.955,31.423 151.956,36.131 159.131,36.131
P3V3A on L1 "P3V3A_L01_P054" (solid, remove dead copper, pour order 54): 136.062,32.385 144.248,32.385 144.248,30.822 142.973,30.822 143.034,27.818 140.489,25.273 137.185,25.273 136.71,25.74 135.578,25.739 134.991,26.326 134.991,31.314 135.904,32.227
P7V5 on L1 "P7V5_L01_P158" (solid, remove dead copper, pour order 158): 168.656,34.366 168.656,38.512 169.572,39.434 176.337,39.433 177.5,38.27 177.5,35.26 175.325,33.085 169.937,33.085
GND on L1 "GND_L01_P070" (solid, remove dead copper, pour order 70): 136.684,20.396 140.077,20.396 140.327,20.146 140.398,20.146 140.416,20.146 141.077,19.485 142.327,18.235 142.327,17.585 142.327,17.158 142.315,17.146 136.684,17.146
no net on L6 "balancing" (solid, pour order 360): 40.521,220.827 193.417,220.827 193.417,126.89 152.725,126.89 151.773,125.955 41.504,125.955 40.533,126.926 40.521,131.942 34.996,131.942 34.996,215.775 40.521,215.775
P7V5 on L6 "P7V5_L04_P346" (solid, remove dead copper, pour order 346): 170.879,36.689 170.879,33.926 170.1,33.147 145.014,33.147 142.113,30.246 142.113,19.562 139.02,16.47 124.422,16.47 123.889,17.003 123.889,18.529 124.396,19.037 136.761,19.037 138.493,20.769 138.493,32.004 143.827,37.338 170.229,37.338
P5V5A on L6 "P5V5A_L04_P336" (solid, remove dead copper, pour order 336): 135.027,25.821 131.203,25.821 130.847,25.465 130.847,23.077 132.495,21.429 137.079,21.429 137.295,21.646 137.295,23.552
P7V5 on L6 "L6-P7V5A" (solid, pour order 104): 73.66,24.371 73.66,21.4 73.914,21.145 75.298,21.145 75.622,21.469 75.622,23.61 78.365,26.353 94.552,26.353 100.973,19.931 120.96,19.931 123.889,17.003 126.092,17.003 126.092,19.031 123.025,22.098 102.12,22.098 95.833,28.384 77.673,28.384
no net on L6 "NONET_L04_P330" (solid, remove dead copper, pour order 330): 133.006,28.449 134.784,28.449 134.784,29.822 135.419,30.457 135.419,31.624 135.228,31.815 133.882,31.815 133.488,31.42 131.595,31.42 131.101,30.926 131.101,30.329 131.583,29.846 132.371,29.846 133.006,29.211
NetC73_2 on L6 "NETC73_2_L04_P002" (solid, remove dead copper, pour order 2): 168.921,19.512 176.175,19.512 176.848,20.185 176.848,22.096 175.767,23.177 169.572,23.177 168.298,21.904 168.298,21.635 168.298,20.135
P12V0 on L6 "P12V0_L04_P258" (solid, remove dead copper, pour order 258): 174.887,29.458 183.728,37.896 187.621,37.896 188.595,36.922 188.595,32.491 180.572,24.468 170.298,24.468 167.958,22.128 167.957,17.907 167.449,17.399 164.646,17.399 148.209,17.399 147.257,16.446 145.621,16.446 144.97,17.097 144.97,19.107 145.339,19.475 156.22,19.475 161.213,24.468 164.15,24.468 169.141,29.458
P12V0 on L6 "P12V0_L04_P356" (solid, remove dead copper, pour order 356): 177.578,19.748 178.74,19.748 180.077,21.085 180.077,23.973 182.647,26.543 175.002,26.543 177.8,23.745 177.8,21.095 177.356,20.65 177.355,19.97
GND on P5 (split plane): 189.583,14.595 30.508,14.595 30.508,22.434 30.498,22.534 30.469,22.63 30.422,22.718 30.359,22.795 29.376,23.778 29.402,23.803 29.4,23.807 29.373,23.78 28.508,24.646 28.508,97.16 28.508,103.945 30.359,105.795 30.422,105.873 30.469,105.961 30.498,106.057 30.508,106.156 30.508,113.675 189.583,113.675
GND on P2 (split plane): 189.583,14.595 30.508,14.595 30.508,22.434 30.498,22.534 30.469,22.63 30.422,22.718 30.359,22.795 29.376,23.778 29.402,23.803 29.4,23.807 29.373,23.78 28.508,24.646 28.508,97.16 28.508,103.945 30.359,105.795 30.422,105.873 30.469,105.961 30.498,106.057 30.508,106.156 30.508,113.675 189.583,113.675

## Keep-outs
L1:
  lines w0.254: 36.452,16.797 36.452,17.537 ; 36.452,21.826 36.452,22.238 ; 36.452,110.726 36.452,111.138 ; 36.477,18.803 36.477,20.404 ; 36.477,107.704 36.477,109.304
Keep-Out Layer:
  drawing of 3471 lines, arcs and shapes, not listed

## Other copper
L1:
  rectangle net NetIC19_2: 157.465,20.55 158.28,20.898
  rectangle net P12V0: 160.591,19.685 162.687,20.32
  rectangle net GND: 160.442,21.082 162.56,21.66
  rectangle net GND: 81.446,17.506 82.445,18.506
  rectangle net GND: 71.446,17.506 72.446,18.506
  rectangle net GND: 55.665,17.506 56.664,18.506
  rectangle net GND: 45.665,17.506 46.665,18.506

## Silkscreen, mask and mechanical layers (free items; w line width, h text height)
Top Overlay:
  drawing of 1247 lines, arcs and shapes, not listed
  text "Mirny v1.1.1" at 168.541,146.719 h1.5
  text "WUT ISE 2021" at 169.961,143.819 h1.02
  text "G" at 38.227,108.077 h1.02
  text "To float SMA / grounds remove / 0R resistors / (G)" at 41.275,105.985 h1.02
  text "EEM 0" at 180.415,75.535 h1.52
  text "P3V3A" at 137.368,27.814 h0.76
  text "P3V6" at 159.5,27.329 h0.76
  text "TP5" at 189.166,26.543 h0.76 r90
  text "P5V5A" at 152.548,25.613 h0.7
  text "TP9" at 183.39,24.892 h0.76 r90
  text "TP7" at 189.166,24.003 h0.76 r90
  text "TP6" at 183.39,22.356 h0.76 r90
  text "G" at 37.827,19.134 h1.02
  text "P3V3" at 101.438,15.367 h0.76
  text "P5V0A" at 105.646,15.367 h0.76
  text "P3V3_MP" at 90.233,15.24 h0.76
  text "P3V3A" at 96.378,15.24 h0.76
  text "P7V0" at 110.726,15.24 h0.76
  text "P12V0" at 114.98,15.176 h0.76
Bottom Overlay:
  drawing of 1237 lines, arcs and shapes, not listed
  text "Mirny v1.1" at 174.562,92.704 h1.5
  text "WUT ISE 2020" at 173.286,90.138 h1.02
Mechanical 1:
  lines w0.1: 28.048,24.455 28.048,97.16 28.048,104.135 29.048,105.135 30.048,106.135 30.048,114.135 190.043,114.135 190.043,14.135 30.048,14.135 30.048,22.455 28.048,24.455
SHIELD:
  lines w1: 92.132,35.006 40.132,35.006 ; 92.132,52.006 40.132,52.006 ; 92.132,69.006 40.132,69.006 ; 92.132,86.006 40.132,86.006 ; 92.132,103.006 53.132,103.006 40.132,103.006 40.132,86.006 ; 40.132,35.006 40.132,18.006 92.132,18.006 92.132,24.214 ; 40.132,35.006 40.132,52.006 ; 40.132,52.006 40.132,69.006 ; 40.132,69.006 40.132,86.006 ; 92.132,24.214 122.132,24.214 122.132,44.214 ; 92.132,24.214 92.132,44.214 ; 92.132,44.214 122.132,44.214 ; 92.132,44.214 92.132,64.214 ; 92.132,64.214 122.132,64.214 ; 92.132,64.214 92.132,84.214 ; 92.132,84.214 122.132,84.214 ; 92.132,84.214 92.132,104.214 122.132,104.214 122.132,84.214 ; 122.132,44.214 122.132,64.214 ; 122.132,64.214 122.132,84.214
Mechanical 13:
  lines w0.152: 25.004,-0.103 25.004,132.51 ; 27.504,-0.103 27.504,132.51
Stackup:
  drawing of 295 lines, arcs and shapes, not listed
  text "Layer" at 53.723,154.178 h1.52
  text "Name" at 64.135,154.178 h1.52
  text "Material" at 87.751,154.178 h1.52
  text "Thickness" at 109.589,154.178 h1.52
  text "Constant" at 126.094,154.178 h1.52
  text "Board Layer Stack" at 140.569,154.178 h1.52
  text "Top Overlay" at 64.135,151.13 h1.52
  text "Top Solder" at 64.135,148.082 h1.52
  text "Solder Resist" at 87.751,148.082 h1.52
  text "0,034mm" at 109.589,148.082 h1.52
  text "3.5" at 126.094,148.082 h1.52
  text "1" at 53.723,145.034 h1.52
  text "L1" at 64.135,145.034 h1.52
  text "0,035mm" at 109.589,145.034 h1.52
  text "Dielectric1" at 64.135,141.986 h1.52
  text "PP-021" at 87.751,141.986 h1.52
  text "0,180mm" at 109.589,141.986 h1.52
  text "4.7" at 126.094,141.986 h1.52
  text "2" at 53.723,138.938 h1.52
  text "P2" at 64.135,138.938 h1.52
  text "CF-004" at 87.751,138.938 h1.52
  text "0,035mm" at 109.589,138.938 h1.52
  text "Dielectric 4" at 64.135,135.89 h1.52
  text "FR4" at 87.751,135.89 h1.52
  text "1,000mm" at 109.589,135.89 h1.52
  text "4.1" at 126.094,135.89 h1.52
  text "3" at 53.723,132.842 h1.52
  text "P5" at 64.135,132.842 h1.52
  text "CF-004" at 87.751,132.842 h1.52
  text "0,035mm" at 109.589,132.842 h1.52
  text "Dielectric 3" at 64.135,129.794 h1.52
  text "PP-021" at 87.751,129.794 h1.52
  text "0,180mm" at 109.589,129.794 h1.52
  text "4.7" at 126.094,129.794 h1.52
  text "4" at 53.723,126.746 h1.52
  text "L6" at 64.135,126.746 h1.52
  text "0,035mm" at 109.589,126.746 h1.52
  text "Bottom Solder" at 64.135,123.698 h1.52
  text "Solder Resist" at 87.751,123.698 h1.52
  text "0,034mm" at 109.589,123.698 h1.52
  text "3.5" at 126.094,123.698 h1.52
  text "Bottom Overlay" at 64.135,120.65 h1.52

## Text inside footprints (layer, text, board x,y; h text height)
J1: Top Overlay "30" at 187.099,35.009 h1.02 r270; Mechanical 14 "30" at 187.099,35.009 h1.02 r270